# Altium PCB PCB2.PcbDoc
Units mil, origin at the board's own origin, x right, y up, seen from the top; angles counter-clockwise.
Board outline 3000 x 3000 mil, 2 copper layers (Top Layer, Bottom Layer); 43 components, 15 nets, 72 pads, 46 vias.
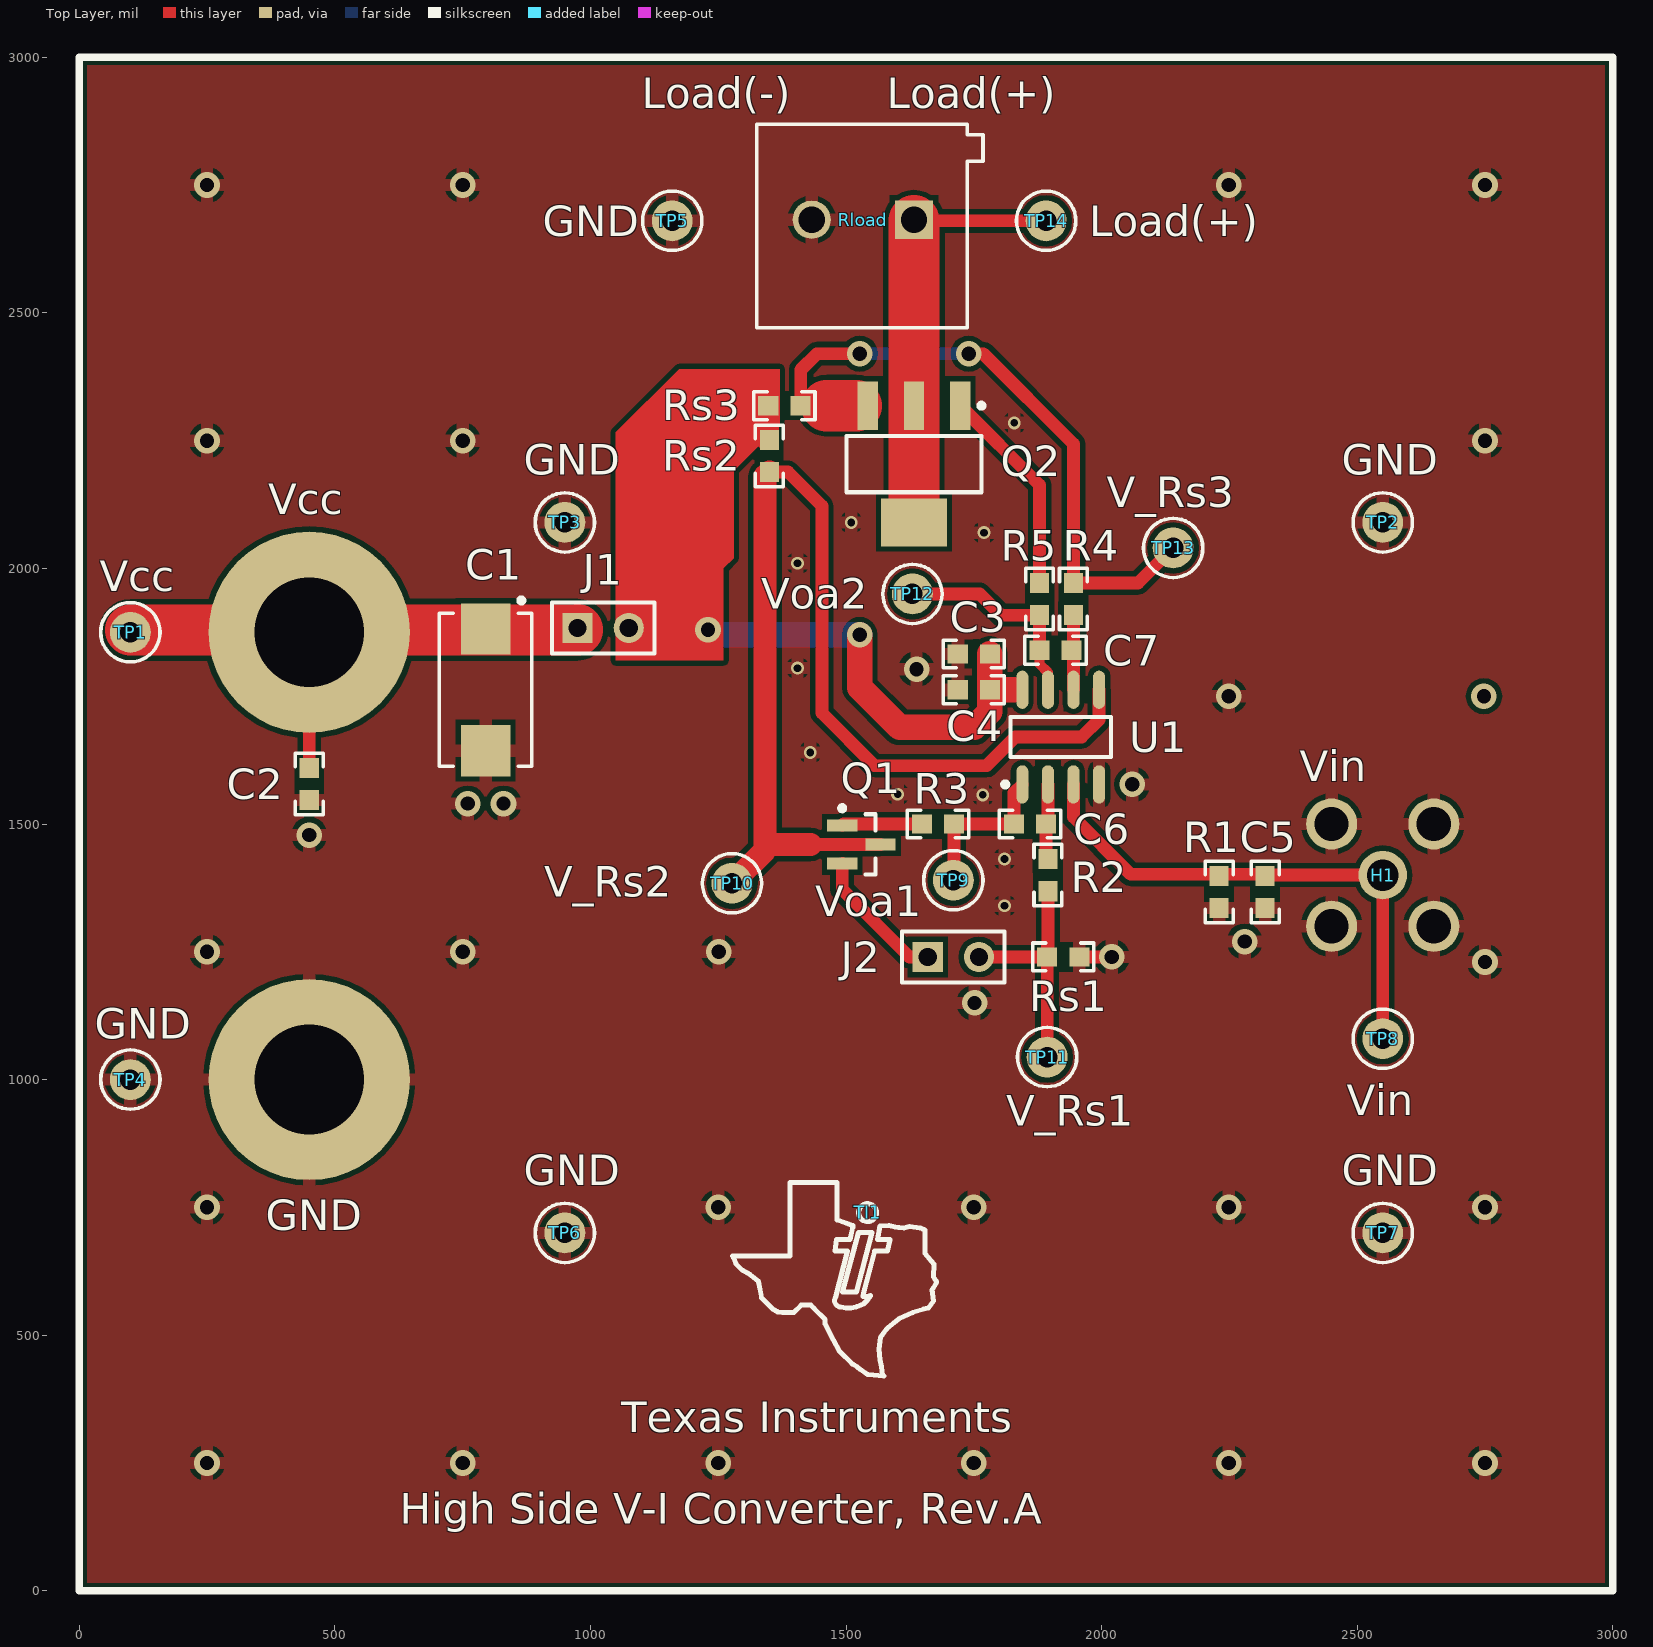
[diagram p0: Top Layer view]
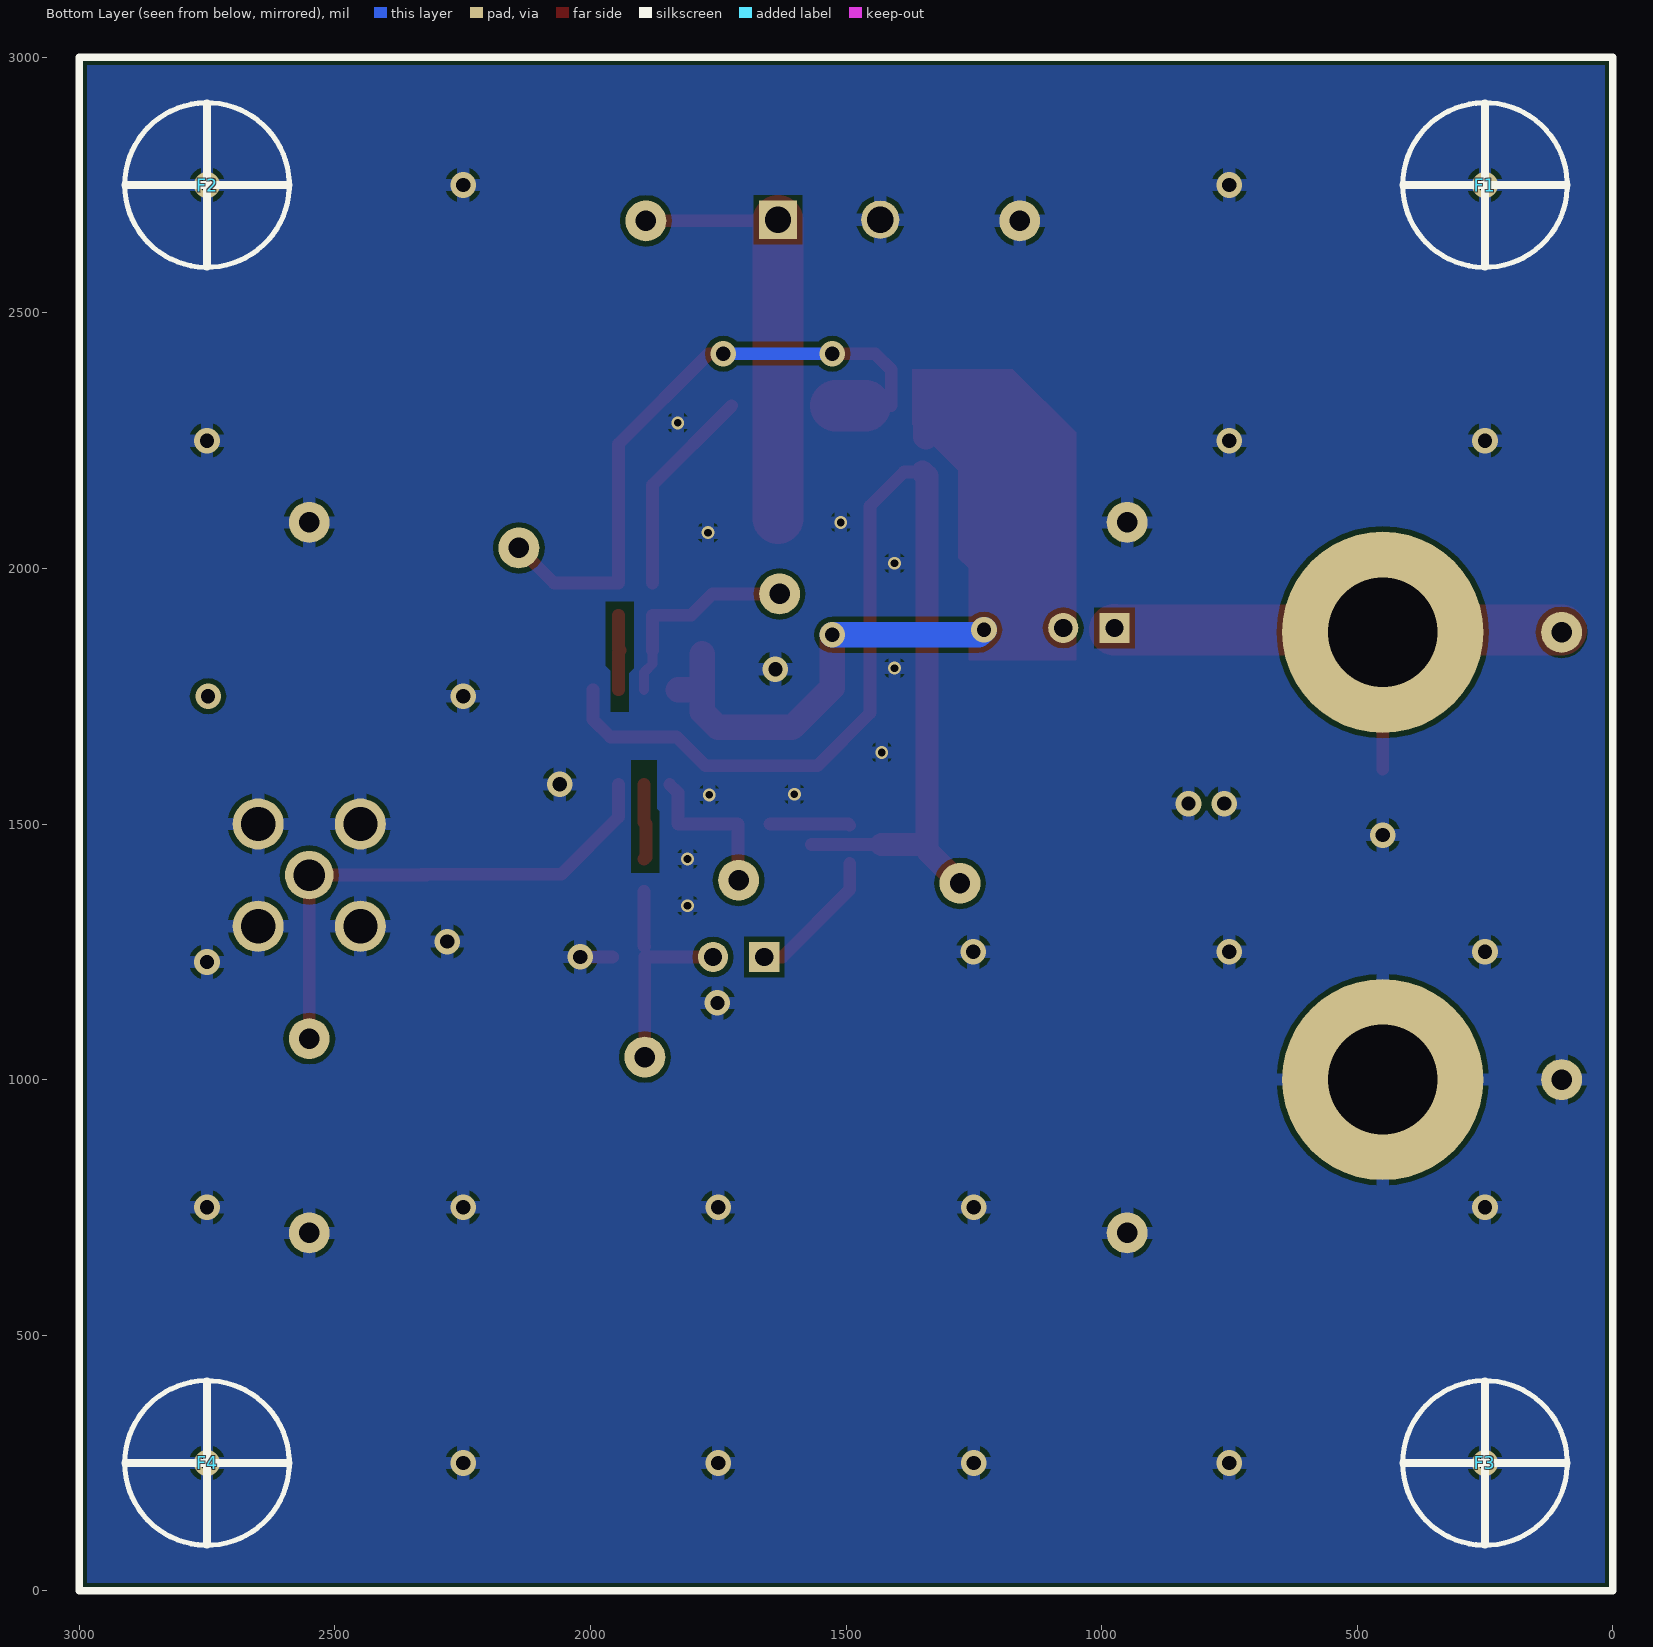
[diagram p1: Bottom Layer view, seen from below]

## Layer stack, top to bottom
Top Layer: signal copper 1.4
Dielectric: dielectric 12.6, FR-4, Dk 4.8
Bottom Layer: signal copper 1.4

## Board outline
0,3000 3000,3000 3000,0 0,0 0,3000

## Design rules (kind name [scope] priority, off if disabled: settings)
Clearance [All] p1: gap=10
HoleSize [All] p1: absolutevalues=TRUE maxlimit=246 minlimit=15 maxpercent=80.000 minpercent=20.000
MinimumSolderMaskSliver [All] p1: minsoldermaskwidth=6
PolygonConnect [All] p1: connectstyle=Relief reliefconductorwidth=25 reliefentries=4 polygonreliefangle="90 Angle" airgapwidth=10
RoutingVias [All] p1: holewidth=28 width=50 viastyle="Through Hole" minholewidth=28 minwidth=50 maxholewidth=28 maxwidth=50
SilkToSilkClearance [All] p1: silktosilkclearance=0
SilkscreenOverComponentPads [All] p1: minsilkscreentomaskgap=1
SolderMaskExpansion [All] p1: expansion=4
Width [All] p1: maxlimit=100 minlimit=10 preferedwidth=20
24 further rules are at their usual default settings.

## Components (designator, comment, footprint, x,y, rotation, side; value= is the part's Value field where it differs from the comment)
C1 "TPSE106K050R0400" 7343-43 795,1762.52 r270 top
C2 "GRM188R72A104KA35D" 0603 450,1578.39 r270 top
C3 "GRM188R72A104KA35D" 0603 1750,1832.52 r180 top
C4 "C1608C0G2A101J" 0603 1750,1762.52 r180 top
C5 "06035A100JAT2A" 0603 2320,1367 r270 top
C6 "06031C102JAT2A" 0603 1860,1500 r0 top
C7 "C1608C0G1H222J" 0603 1910,1840 r0 top
F1 "PartNumber" Rubber_Foot 250,2750 r180 bottom
F2 "PartNumber" Rubber_Foot 2750,2750 r180 bottom
F3 "PartNumber" Rubber_Foot 250,250 r180 bottom
F4 "PartNumber" Rubber_Foot 2750,250 r180 bottom
GND "575-4" Keystone_575-4 450,1000 r90 top
H1 "Vin" Johnson_142-0701-20x 2550,1400 r90 top
J1 "TSM-102-01-T-SV" HDR1X2 975,1883.69 r0 top
J2 "TSM-102-01-T-SV" HDR1X2 1660,1240 r0 top
Q1 "SI2304DS,215" SOT-23 1530,1460 r0 top
Q2 "SI2337DS-T1-E3" MP04A_N 1633,2204.12 r270 top
R1 "RG1608P-103-B-T5" 0603 2230,1367 r90 top
R2 "CRCW060310K0FKEA" 0603 1895,1400 r270 top
R3 "CRCW0603200RFKEA" 0603 1680,1500 r180 top
R4 "CRCW060310K0FKEA" 0603 1945,1940 r90 top
R5 "RC0603FR-07330RL" 0603 1878.5,1940 r90 top
Rload "1715721" PhoenixContact_1715721 1533,2682.12 r180 top
Rs1 "RG1608P-202-B-T5" 0603 1925,1240 r180 top
Rs2 "RGH1608-2C-P-471-B" 0603 1350,2220 r90 top
Rs3 "8-1614882-3" 0603 1379.42,2318.29 r180 top
TI1 "Texas Instruments logo" "TI LOGO" 1542.45,740 r0 top
TP1 "Vcc" Keystone5000 100,1875 r90 top
TP2 "GND" Keystone5001 2550,2089.94 r90 top
TP3 "GND" Keystone5001 950,2089.94 r90 top
TP4 "GND" Keystone5001 100,1000 r90 top
TP5 "GND" Keystone5001 1160,2680 r90 top
TP6 "GND" Keystone5001 950,700.1 r90 top
TP7 "GND" Keystone5001 2550,700 r90 top
TP8 "Vin" Keystone5000 2550,1080 r90 top
TP9 "Voa1" Keystone5002 1710,1390 r90 top
TP10 "V_Rs2" Keystone5002 1277,1384 r90 top
TP11 "V_Rs1" Keystone5002 1893.5,1044 r90 top
TP12 "Voa2" Keystone5002 1630,1950 r90 top
TP13 "V_Rs3" Keystone5002 2140,2040 r90 top
TP14 "Load(+)" Keystone5002 1891.5,2680 r90 top
U1 "OPA2333" M08A_L 1920,1670 r90 top
Vcc "575-4" Keystone_575-4 450,1875 r90 top

## Footprints (in the part's own frame and the unit in brackets; to place one, negate y for a bottom-side part, rotate by r counter-clockwise, add the part's x,y. Pads: shape width x height; smd on the part's side, far side on the other; paste and mask are expansions set on the pad)
0603 [mm] "0603 from SM-752 data"
  rect 1x0.95 smd: 1(-0.8,0) 2(0.8,0)
  silkscreen extent -1.52,-0.69 1.52,0.69, body extent -0.87,-0.47 0.87,0.47, height 0.85
7343-43 [mm] "Medium density IPC based on Kemet T495 series"
  rect 2.55x2.45 smd: 1(-3.025,0) 2(3.025,0)
  silkscreen extent -4.56,-2.3 3.8,2.3, body extent -3.8,-2.3 3.8,2.3, height 4.3
HDR1X2 [mm] "Connector; Header; 2 Position"
  rect 1.5x1.5 hole 0.9: 1(0,0)
  round 1.5 hole 0.9: 2(2.54,0)
  silkscreen extent -1.27,-1.27 3.81,1.27
Johnson_142-0701-20x [mil] "Johnson Components recommended land pattern"
  round 95 hole 62: 1(0,0)
  round 100 hole 67: 2(100,100) 3(100,-100) 4(-100,-100) 5(-100,100)
  body extent -156,-156 156,156, height 375
Keystone5000 [mil] "For Keystone 500x miniature loop terminals"
  round 80 hole 40: 1(0,0)
  silkscreen extent -58,-58 58,58, body extent -49,-49 49,49, height 182
Keystone5001 [mil] "For Keystone 500x miniature loop terminals"
  round 80 hole 40: 1(0,0)
  silkscreen extent -58,-58 58,58, body extent -49,-49 49,49, height 182
Keystone5002 [mil] "For Keystone 500x miniature loop terminals"
  round 80 hole 40: 1(0,0)
  silkscreen extent -58,-58 58,58, body extent -49,-49 49,49, height 182
Keystone_575-4 [mm] "Banana Jack"
  round 10 hole 5.45: 1(0,0)
  body extent -3.95,-3.95 3.92,3.93, height 2.36
M08A_L [mm] "SOIC, 8-Leads, Body 4.9x3.9mm, Pitch 1.27mm, IPC High Density"
  oval 1.9x0.6 smd: 1(-2.35,1.905) 2(-2.35,0.635) 3(-2.35,-0.635) 4(-2.35,-1.905) 5(2.35,-1.905) 6(2.35,-0.635) 7(2.35,0.635) 8(2.35,1.905)
  silkscreen extent -2.47,-2.5 1,2.88, body extent -2,-2.5 2,2.5, height 1.75
MP04A_N [mm] "SOT223, 4-Leads, Body 6.5x3.5mm, Pitch 2.3mm, Lead Span 7mm, IPC Medium Density"
  rect 2.4x1 smd: 1(-2.9,2.3) 2(-2.9,0) 3(-2.9,-2.3)
  rect 2.4x3.3 smd: 4(2.9,0)
  silkscreen extent -3.02,-3.35 1.4,3.48, body extent -1.85,-3.35 1.85,3.35, height 1.8
PhoenixContact_1715721 [mm] "Phoenix Contact 1715721 used on LM3445 design from Longmont"
  rect 1.905x1.905 hole 1.3: 1(-2.54,0)
  round 1.9 hole 1.3: 2(2.54,0)
  silkscreen extent -5.97,-4.75 5.28,5.36, body extent -5.82,-4.6 5.08,5.2, height 14.2
Rubber_Foot [mil] "Rubber Foot"
  silkscreen extent -161,-161 161,161
SOT-23 [mm] "SOT23, 3-Leads, Body 2.9x1.3mm, Pitch 0.95mm, Lead Span 2.5mm, IPC Medium Density"
  rect 1.5x0.6 smd: 1(-0.95,0.95) 2(-0.95,-0.95) 3(0.95,0)
  silkscreen extent -1.07,-1.5 0.7,1.92, body extent -1.16,-1.45 1.21,1.45, height 1
"TI LOGO" [mil] "TI BUG"
  silkscreen extent -264,-320 135,59

## Part data
C1: "CAP, TANT, 10uF, 50V, +/-10%, 0.4 ohm, 7343-43 SMD"
C2 C3: "CAP, CERM, 0.1uF, 100V, +/-10%, X7R, 0603"
C4: "CAP, CERM, 100pF, 100V, +/-5%, C0G/NP0, 0603"
C5: "CAP, CERM, 10pF, 50V, +/-5%, C0G/NP0, 0603"
C6: "CAP, CERM, 1000pF, 100V, +/-5%, X7R, 0603"
C7: "CAP, CERM, 2200pF, 50V, +/-5%, C0G/NP0, 0603"
F1 F2 F3 F4: library part SJ61A1, "BUMPON CYLINDRICAL .312X.200 BLK"
GND Vcc: "Standard Banana Jack, Uninsulated, 5.5mm"
H1: library part 142-0701-201, "Connector, TH, SMA"
J1 J2: "CONN HEADER 2POS .100\" SNGL SMD"
Q1: library part SI2316BDS-T1-E3, "MOSFET, N-CH, 30V, 4.5A, SOT-23"
Q2: "MOSFET, P-CH, -80V, -1.2A, SOT-23"
R1: "RES, 10.0k ohm, 0.1%, 0.1W, 0603"
R2 R4: "RES, 10.0k ohm, 1%, 0.1W, 0603"
R3: "RES, 200 ohm, 1%, 0.1W, 0603"
R5: "RES, 330 ohm, 1%, 0.1W, 0603"
Rload: "Conn Term Block, 2POS, 5.08mm PCB"
Rs1: "RES, 2.00k ohm, 0.1%, 0.1W, 0603"
Rs2: library part RG1608P-101-B-T5, "RES 470 OHM 1/6W 0.1% 0603"
Rs3: library part CRCW06031R00FKEA, "RES 4.70 OHM 1/16W 0.1% 0603"
TI1: library part "TI LOGO", "TI BUG"
TP1 TP8: library part 5000, "Test Point, TH, Miniature, Red"
TP2 TP3 TP4 TP5 TP6 TP7: library part 5001, "Test Point, TH, Miniature, Black"
TP9 TP10 TP11 TP12 TP13 TP14: library part 5002, "Test Point, TH, Miniature, White"
U1: library part LM6142AIM, "17MHz Rail-to-Rail Input and Output Op Amp"

## Via types
v1: diameter 50, hole 28, Top Layer to Bottom Layer, 36 vias
v2: diameter 25, hole 15, Top Layer to Bottom Layer, 10 vias

## Nets (pads, with @x,y where several pads share a name; then routed paths per layer and width w, separated by ;. In a path a pad name is that pad's centre, name@x,y a point inside that pad or via, vN(x,y) a via of type N, cw(c..) or ccw(c..) an arc to the next point about the centre after c; other vN are vias at no path point)
GND: C1.2 C2.2 C3.2 C4.2 C5.2 GND.1 H1.2 H1.3 H1.4 H1.5 R1.1 Rload.2 Rs1.1 TP2.1 TP3.1 TP4.1 TP5.1 TP6.1 TP7.1 U1.4 | length 63.5
  Top Layer w25: Rs1.1 v1(2020,1240)
  other v1: 250,250 750,250 1250,250 1750,250 2249,250 2750,250 250,750 1250,750 1750,750 2249,750 2750,750 1751.5,1150 2750,1230 250,1250 750,1250 1251,1250 2280,1270 450,1478.39 760,1540 830,1540 2060,1577.48 2249,1750 1638,1803 250,2250 750,2250 2750,2250 250,2750 750,2750 2249,2750 2750,2750
  other v2: 1809.95,1340 1809.95,1431.5 1767.65,1557 1601,1558 1430,1640 1405,1805 1405,2010 1770,2070 1510.08,2089.94 1829.28,2284.67
NetC1_1: C1.1 C2.1 J1.1 TP1.1 Vcc.1 | length 1142.6
  Top Layer w25: C2.1@450,1607.4 Vcc.1
  Top Layer w100: TP1.1@100,1879.68 J1.1@975,1880.03
NetC5_1: C5.1 H1.1 R1.2 TP8.1 U1.3 | length 1045.4
  Top Layer w25: U1.3 1945,1513.5 2057.01,1401.5 C5.1@2330,1401.5 ; C5.1@2320,1400 H1.1 TP8.1
NetC6_1: C6.1 R3.1 TP9.1 U1.1 | length 311.9
  Top Layer w25: TP9.1 1711.5,1391.5 R3.1 C6.1 1828.5,1560.98 U1.1
NetC6_2: C6.2 R2.1 U1.2 | length 148.9
  Top Layer w25: R2.1 1891.5,1435 C6.2 1895,1503.5 U1.2
NetC7_1: C7.1 R5.1 TP12.1 U1.7 | length 418.5
  Top Layer w20: C7.1 1878.5,1812.99 1895,1796.5 U1.7
  Top Layer w25: TP12.1 1761.5,1950 1802.99,1908.5 R5.1 C7.1
NetC7_2: C7.2 R4.1 U1.6 | length 148.9
  Top Layer w25: U1.6 1945,1836.5 C7.2 1945,1843.5 R4.1
NetJ2_1: J2.1 Q1.2 | length 272.8
  Top Layer w25: Q1.2 1492.6,1371.72 1624.32,1240 J2.1
NetJ2_2: J2.2 R2.2 Rs1.2 TP11.1 | length 438.6
  Top Layer w25: J2.2 Rs1.2 TP11.1 ; 1893.5,1260 1895,1261.5 R2.2
NetQ1_1: Q1.1 R3.2 | length 157
  Top Layer w25: Q1.1 1495.2,1500 R3.2
NetQ1_3: Q1.3 Rs2.1 TP10.1 U1.5 | length 2260.6
  Top Layer w25: Rs2.1@1365.5,2188.5 1386.5,2188.5 1453,2122 1453,1717 1556,1614 1775,1614 1831,1670 1961,1670 1995,1704 U1.5 ; 1431,1460 Q1.3
  Top Layer w45: TP10.1 1342,1449 1342,1460 ; Rs2.1 1342,2180.5 1342,1460 ; 1431,1460 1342,1460
NetQ2_1: Q2.1 R5.2 | length 411
  Top Layer w25: Q2.1 1878.5,2163.34 R5.2
NetQ2_2: Q2.2 Q2.4 Rload.1 TP14.1 | length 838.4
  Top Layer w25: Rload.1@1635.12,2680 TP14.1
  Top Layer w100: Q2.4@1633,2098 Q2.2 Rload.1@1633,2680
NetQ2_3: Q2.3 R4.2 Rs3.1 TP13.1 | length 1243.2
  Top Layer w25: Rs3.1@1411.5,2318.29 1411.5,2388.5 1443,2420 v1(1527,2420) ; v1(1740,2420) 1768.5,2420 1945,2243.5 R4.2 2071.5,1971.5 TP13.1
  Top Layer w100: 1462,2318.29 1520,2318.29
  Bottom Layer w25: v1(1527,2420) v1(1740,2420)
VCC: C3.1 C4.1 J1.2 Rs2.2 Rs3.2 U1.8 | length 1464.4
  Top Layer w50: J1.2 1075,2045.37 1343.92,2316.29 Rs2.2@1343.92,2258 ; v1(1527,1870) 1527,1767 1605.07,1688.93 1750.43,1688.93 1781.5,1720 C4.1 ; C3.1 C4.1 ; 1827.82,1762.52 C4.1
  Bottom Layer w50: v1(1230,1880) 1240,1870 v1(1527,1870)
copper on no net:
  other v1: 2748,1750

## Polygon pours and split planes (outlines as drawn)
GND on Top Layer "GND" (solid, remove dead copper, pour order 3): 0,3000 3000,3000 3000,0 0,0
GND on Bottom Layer "GND" (solid, remove dead copper, pour order 4): 0,3000 3000,3000 3000,0 0,0

## Keep-outs
Keep-Out Layer:
  the board outline again, w10

## Other copper
Top Layer:
  pour cut-out: 1870,1625 1870,1530 1865,1525 1865,1405 1920,1405 1920,1625
  pour cut-out: 1960,1720 1960,1800 1970,1810 1970,1935 1915,1935 1915,1805 1925,1795 1925,1720
  region net VCC: 1050,2266 1174,2390 1370,2390 1370,2281 1280,2191 1280,2020 1260,2000 1260,1820 1050,1820
Bottom Layer:
  pour cut-out: 1870,1625 1870,1530 1865,1525 1865,1405 1920,1405 1920,1625
  pour cut-out: 1960,1720 1960,1800 1970,1810 1970,1935 1915,1935 1915,1805 1925,1795 1925,1720

## Silkscreen, mask and mechanical layers (free items; w line width, h text height)
Top Overlay:
  the board outline again, w15
  text "Load(-)" at 1100,2900 h60
  text "Load(+)" at 1580,2900 h60
  text "Texas Instruments" at 1060,310 h60
  text "High Side V-I Converter, Rev.A" at 627,131 h60
Bottom Overlay:
  the board outline again, w15
Top Solder:
  the board outline again, w15
Bottom Solder:
  the board outline again, w15